# EAGLE board Dig_Stethoscope_final (EAGLE 9.0.1)
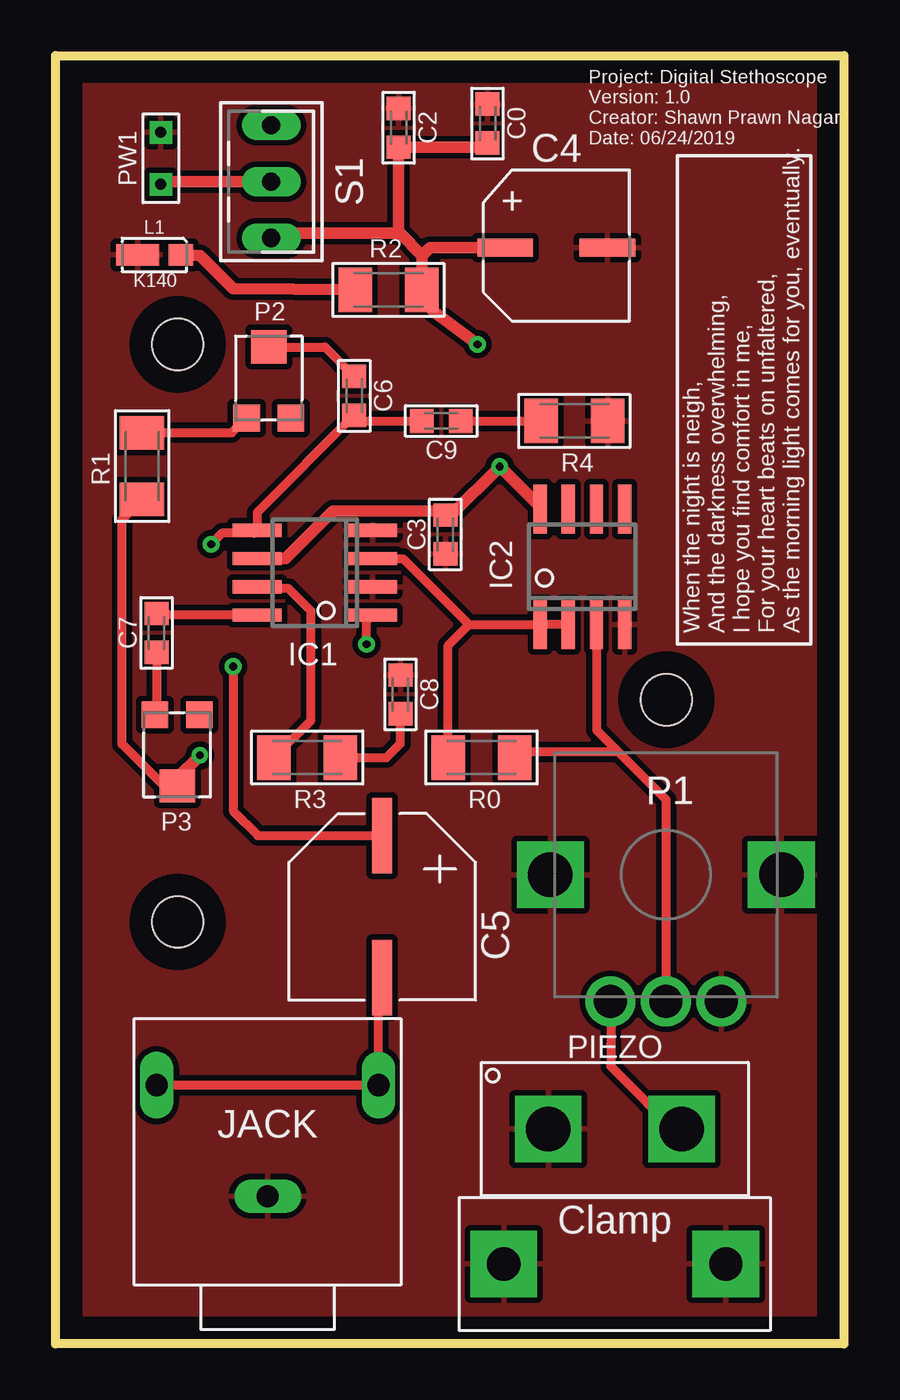
[diagram p0: board, top side]
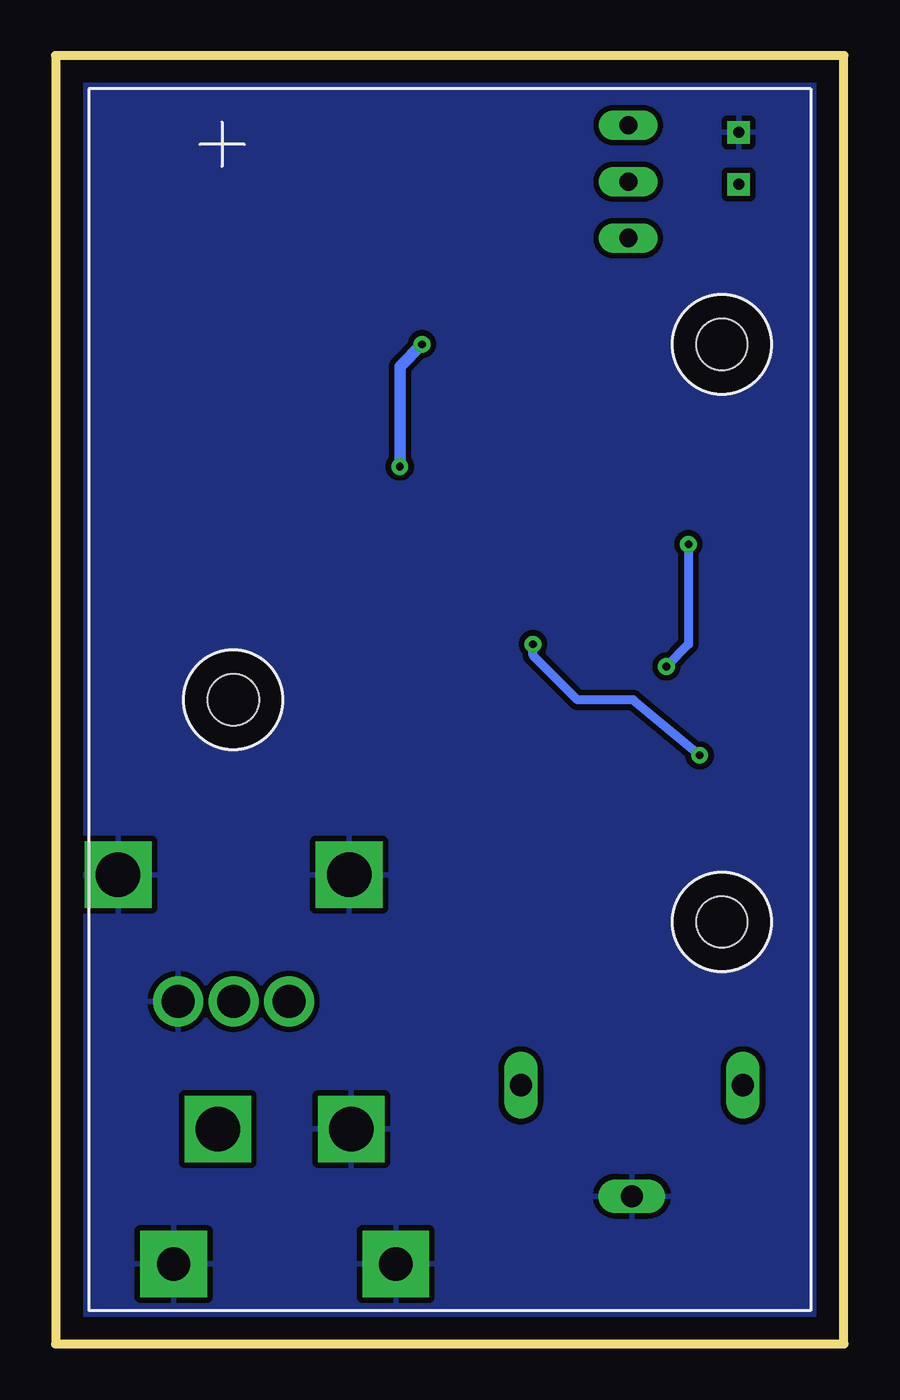
[diagram p1: board, bottom side, seen from below]

Size 35.5 x 58 mm. Coordinates in mm from the lower left corner, seen from the top.
Outline: 0,58 35.5,58 35.5,0 0,0 0,58
Copper layers (1*16): Top 0.035mm / dielectric 1.5mm / Bottom 0.035mm
Design rules "default": minimum track width 6mil, minimum drill 0.35mm, track to track 6mil, track to pad 6mil, pad to pad 6mil, via to via 6mil, smd to smd 6mil, copper to edge 40mil, drill to drill 6mil, minimum pad ring 10mil, minimum via ring 8mil, stop-mask expansion 4mil, vias tented up to drill 0mil, thermal gap 10mil

## Footprints (pad centres in the part's own frame; a part is rotated, then mirrored left to right if it is on the bottom)
C0603K = smd 1.05 x 1.08: 1 -0.875,0; 2 0.875,0
CAP_100UF = smd 2.5 x 0.8: P$1 -2.3,0; P$2 2.3,0
CAP_1000F = smd 0.9 x 3.4: P$1 0,3.2; P$2 0,-3.2
SO08 = smd 0.6 x 2.2: 1 -1.905,-2.6; 2 -0.635,-2.6; 3 0.635,-2.6; 4 1.905,-2.6; 5 1.905,2.6; 6 0.635,2.6; 7 -0.635,2.6; 8 -1.905,2.6
JACK = drill 1 long: P$1 0,2; P$2 -5,-3; P$3 5,-3
LTW_LED = smd 1.1 x 0.965: ANODE_1 1.2,0 | smd 1.93 x 0.965: CATH_2 -0.75,0
DIP_POT = drill 2 square: P$1 -5.2,0; P$2 5.2,0 | drill 1.5 pad 2.184: P$3 0,-5.7; P$4 2.5,-5.7; P$5 -2.5,-5.7
TC33X-1/2 = smd 1.6 x 1.5: P$1 0,1.4 | smd 1.2 x 1.2: P$2 -1,-1.8; P$3 1,-1.8
2_PIEZO_DIP = drill 2 pad 3 square: P$1 -3,0; P$2 3,0
2_POWER_DIP = drill 0.5 square: P$1 -1.17,0; P$2 1.17,0
C1206K = smd 1.5 x 2: 1 -1.5,0; 2 1.5,0
9450-1 = drill 0.813 long: 1 -2.54,0; 2 0,0; 3 2.54,0
CLAMP = drill 1.5 pad 3 square: P$1 -5,0; P$2 5,0
POWER_SOCKET = hole 2.3: 16,11; -10,11; 0,-11

## Placement (x,y rotation side)
C0  470pF  [C0603K]  19.45,54.94 270 top
C2  0.1uF  [C0603K]  15.45,54.75 270 top
C3  0.1uF  [C0603K]  17.55,36.44 90 top
C4  100uF  [CAP_100UF]  22.55,49.35 0 top
C5  1000uF  [CAP_1000F]  14.71,19.68 180 top
C6  33nF  [C0603K]  13.45,42.68 270 top
C7  10uF  [C0603K]  4.55,32.01 90 top
C8  10uF  [C0603K]  15.53,29.24 270 top
C9  0.1uF  [C0603K]  17.37,41.55 180 top
IC1  LM386MX-11M  [SO08]  11.68,34.72 90 top
IC2  LM158DTD  [SO08]  23.72,34.98 0 top
J1  JACK  [JACK]  9.55,8.65 180 top
L1  L140_LED  [LTW_LED]  4.45,49.03 0 top
P1  10K ohm  [DIP_POT]  27.48,21.12 0 top
P2  10K ohm  [TC33X-1/2]  9.6,43.48 0 top
P3  5K ohm  [TC33X-1/2]  5.48,26.52 180 top
PIEZO  PIEZO_INPUT  [2_PIEZO_DIP]  25.19,9.68 0 top
PW1  POWER_INPUT  [2_POWER_DIP]  4.74,53.37 90 top
R0  0 ohm  [C1206K]  19.18,26.4 180 top
R1  2.2K ohm  [C1206K]  3.9,39.52 90 top
R2  75 ohm  [C1206K]  14.99,47.45 0 top
R3  10K ohm  [C1206K]  11.33,26.4 180 top
R4  10 ohm  [C1206K]  23.36,41.55 180 top
S1  9450-1  [9450-1]  9.71,52.33 270 top
U1  CLAMP  [CLAMP]  25.18,3.6 0 top
U$1  [POWER_SOCKET]  16.5,29 90 top

## Library data of the parts
C0 C2-C9 IC1 IC2 J1 L1 P1-P3 PIEZO PW1 R0 R1-R4 S1 U1 U$1 = dig_steth

## Nets
GND: C0.1 C2.1 C3.1 C4.P$2 C8.1 IC1.2 IC1.4 IC2.4 J1.P$1 L1.CATH_2 P1.P$1 P1.P$2 P1.P$4 PIEZO.P$1 PW1.P$2 R4.1 U1.P$1 U1.P$2
N$2: IC2.3 P1.P$3 R0.1
N$3: P1.P$5 PIEZO.P$2
N$4: IC1.3 IC2.1 IC2.2 R0.2
N$5: C5.P$2 C6.2 C9.2 IC1.5
N$6: IC1.1 P3.P$1 R1.1
N$8: P2.P$2 R1.2
N$10: C6.1 P2.P$1
N$11: C7.1 P3.P$3
N$12: C7.2 IC1.8
N$13: L1.ANODE_1 R2.1
N$14: IC1.7 R3.2
N$15: C8.2 R3.1
N$16: C9.1 R4.2
N$17: PW1.P$1 S1.2
N$18: C5.P$1 J1.P$2 J1.P$3
VCC: C0.2 C2.2 C3.2 C4.P$1 IC1.6 IC2.8 R2.2 S1.3

## Tracks (layer width: path | path; a pad name or v marks a point on that pad's centre or on a via)
GND
  pour Bottom (isolate 0.254): 0,58 35.5,58 35.5,0 0,0
  pour Top (isolate 0.254): 0,58 35.5,58 35.5,0 0,0
N$2
  Top 0.406: R0.1 20.92,26.65 25.35,26.65 | P1.P$3 27.5,15.44 27.5,24.5 25.35,26.65 | IC2.3 24.35,27.65 25.35,26.65
N$3
  Top 0.406: P1.P$5 25,13.5 25,12.5 28.19,9.31 PIEZO.P$2
N$4
  Top 0.406: IC2.2 IC2.1 18.62,32.38 | IC1.3 15.65,35.35 18.62,32.38 | 18.62,32.38 17.68,31.44 R0.2
N$5  (via drill 0.35)
  Top 0.406: C9.2 13.7,41.55 C6.2 9.08,37.44 IC1.5 8.95,36.5 7.5,36.5 v7,36 | v8,30.5 8,24 9.12,22.88 C5.P$2
  Bottom 0.406: v7,36 7,31.5 v8,30.5
N$6  (via drill 0.35)
  Top 0.406: R1.1 3,37.12 3,27 4.88,25.12 P3.P$1 5.62,25.12 | 13.81,32.81 14,32.81 14,32.53 | v14,31.5 14,32.53 | 14,32.53 IC1.1
  Top 0.508: v6.5,26.5 5.48,25.48 P3.P$1
  Bottom 0.406: v6.5,26.5 9.5,29 12,29 14,31 v14,31.5
N$8
  Top 0.406: R1.2 7.94,41.02 P2.P$2
N$10
  Top 0.406: P2.P$1 12.12,44.88 C6.1
N$11
  Top 0.406: C7.1 4.55,28.39 P3.P$3
N$12
  Top 0.406: IC1.8 4.62,32.81 C7.2
N$13
  Top 0.508: R2.1 8,47.5 6.5,49 L1.ANODE_1
N$14
  Top 0.406: R3.2 11.5,28.07 11.5,33 10.5,34 9.16,34 IC1.7
N$15
  Top 0.406: R3.1 14.9,26.4 15.53,27.03 C8.2
N$16
  Top 0.406: C9.1 R4.2
N$17
  Top 0.508: S1.2 4.87,52.33 PW1.P$1
N$18
  Top 0.406: C5.P$1 14.55,16.32 J1.P$2 J1.P$3
VCC  (via drill 0.35)
  Top 0.508: S1.3 10.5,50 15.5,50 | 15.5,50 16.5,49 | 16.5,49 R2.2 17,46.5 v19,45 | IC1.6 10.35,35.35 12.5,37.5 17.37,37.5 C3.2 17.81,37.31 v20,39.5 21.81,37.69 IC2.8 | 15.5,50 15.45,50.05 C2.2 19.26,53.88 C0.2 | C4.P$1 16.85,49.35 16.5,49
  Bottom 0.508: v20,39.5 20,44 v19,45

## Text on the board
tPlace: Project: Digital Stethoscope / Version: 1.0 / Creator: Shawn Prawn Nagar / Date: 06/24/2019 | When the night is neigh, / And the darkness overwhelming, / I hope you find comfort in me, / For your heart beats on unfaltered, / As the morning light comes for you, eventually.